# EAGLE board BusPirate-demo-v4 (EAGLE 5.10)
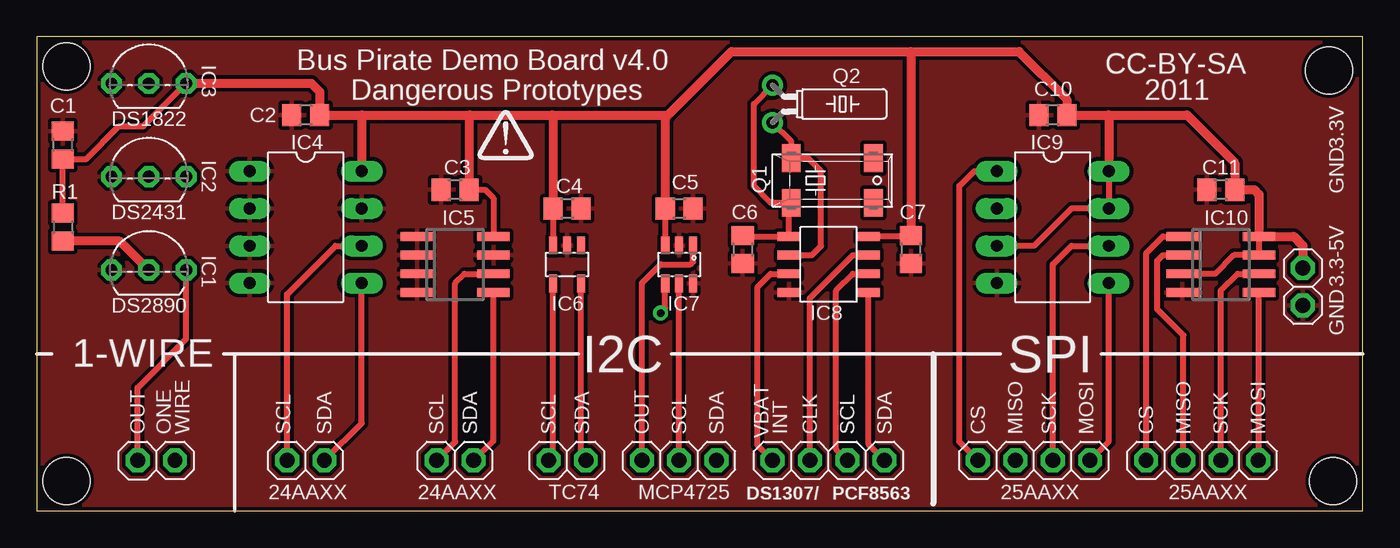
[diagram p0: board, top side]
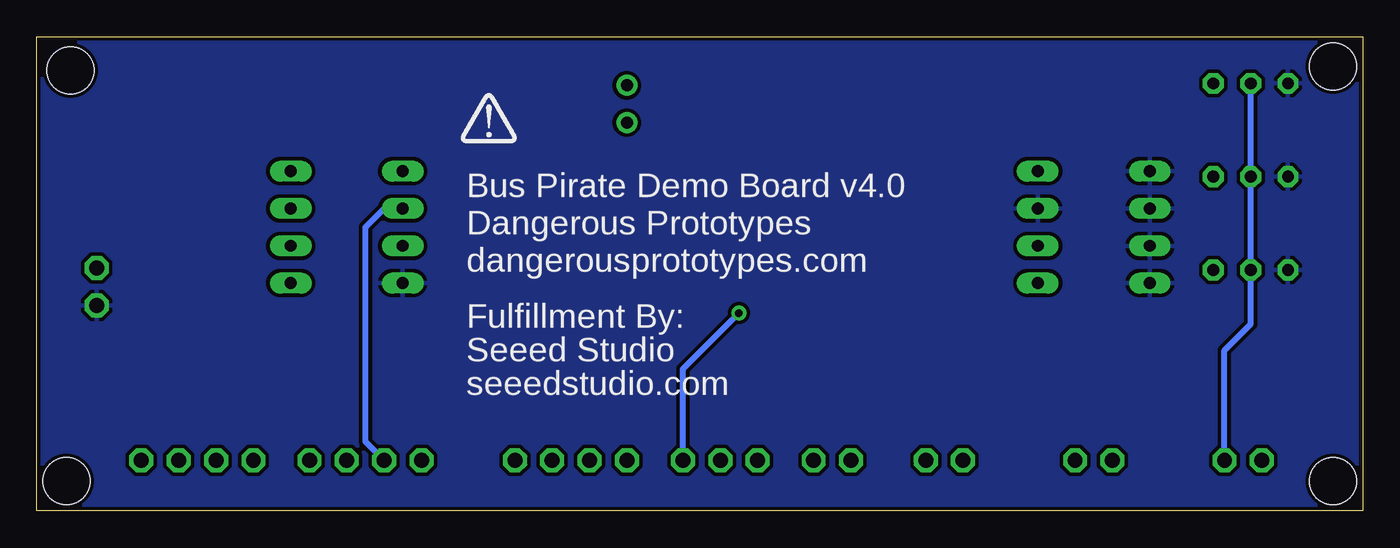
[diagram p1: board, bottom side, seen from below]

Size 90.17 x 32.26 mm. Coordinates in mm from the lower left corner, seen from the top.
Outline: 0,0 90.17,0 90.17,32.26 0,32.26 0,0
Copper layers (1*16): Top 0.035mm / dielectric 1.5mm / Bottom 0.035mm
Design rules "SparkFun - modified *": minimum track width 8mil, minimum drill 15mil, track to track 6mil, track to pad 6mil, pad to pad 6mil, via to via 6mil, smd to smd 6mil, copper to edge 10mil, drill to drill 8mil, minimum pad ring 12mil, minimum via ring 10mil, stop-mask expansion 4mil, vias tented up to drill 25mil, thermal gap 10mil
Holes 3.2 mm at 2.03,2.03 88.14,2.03 87.88,29.97 2.03,30.23

## Footprints (pad centres in the part's own frame; a part is rotated, then mirrored left to right if it is on the bottom)
C805 = smd 1.3 x 1.5: 1 -0.95,0; 2 0.95,0
TO92- = drill 0.813 octagon: 1 -2.54,0; 2 0,0; 3 2.54,0
DIL8 = drill 0.813 long: 1 -3.81,-3.81; 2 -1.27,-3.81; 3 1.27,-3.81; 4 3.81,-3.81; 5 3.81,3.81; 6 1.27,3.81; 7 -1.27,3.81; 8 -3.81,3.81
SO-08 = smd 0.6 x 2.2: 1 -1.905,-2.6; 2 -0.635,-2.6; 3 0.635,-2.6; 4 1.905,-2.6; 5 1.905,2.6; 6 0.635,2.6; 7 -0.635,2.6; 8 -1.905,2.6
SOT-23-5 = smd 0.55 x 1.2: 1 -0.95,-1.3; 2 0,-1.3; 3 0.95,-1.3; 4 0.95,1.3; 5 -0.95,1.3
SOT23-6 = smd 0.55 x 1.2: 1 -0.95,-1.3; 2 0,-1.3; 3 0.95,-1.3; 4 0.95,1.3; 5 0,1.3; 6 -0.95,1.3
SO8 = smd 0.6 x 1.55: 1 -1.905,-2.69; 2 -0.635,-2.69; 3 0.635,-2.69; 4 1.905,-2.69; 5 1.905,2.71; 6 0.635,2.71; 7 -0.635,2.71; 8 -1.905,2.71
1X01 = drill 1.016 octagon: 1 0,0
1X02 = drill 1.016 octagon: 1 -1.27,0; 2 1.27,0
1X03 = drill 1.016 octagon: 1 -2.54,0; 2 0,0; 3 2.54,0
1X04 = drill 1.016 octagon: 1 -3.81,0; 2 -1.27,0; 3 1.27,0; 4 3.81,0
MM20SS = smd 1.27 x 1.88: 1 -2.794,-1.524; 2 2.794,-1.524; 3 2.794,1.524; 4 -2.794,1.524
TC26H = drill 0.813 round: 1 -1.27,0; 2 1.27,0
R805 = smd 1.3 x 1.5: 1 -0.95,0; 2 0.95,0

## Placement (x,y rotation side)
C1  0.1 uF  [C805]  1.78,24.89 90 top
C2  0.1 uF  [C805]  18.29,26.92 180 top
C3  0.1 uF  [C805]  28.45,21.84 180 top
C4  0.1 uF  [C805]  36.07,20.57 0 top
C5  0.1 uF  [C805]  43.69,20.57 0 top
C6  12.5pF  [C805]  48.01,17.78 270 top
C7  0.1 uF  [C805]  59.44,17.78 270 top
C10  0.1 uF  [C805]  69.09,26.92 180 top
C11  0.1 uF  [C805]  80.52,21.84 180 top
IC1  DS2890  [TO92-]  7.62,16.38 0 top
IC2  DS2431  [TO92-]  7.62,22.73 0 top
IC3  DS1822  [TO92-]  7.62,29.08 0 top
IC4  24AA02P  [DIL8]  18.29,19.3 270 top
IC5  24AA02SN  [SO-08]  28.45,16.76 270 top
IC6  TC74  [SOT-23-5]  36.07,16.76 180 top
IC7  MCP4725  [SOT23-6]  43.69,16.76 180 top
IC8  PCF8563/DS1307  [SO8]  53.85,16.76 270 top
IC9  25AA080P  [DIL8]  69.09,19.3 270 top
IC10  25AA080SN  [SO-08]  80.52,16.76 270 top
JP1  [1X01]  9.4,3.43 0 top
JP2  [1X01]  6.86,3.43 90 top
JP3  [1X02]  18.29,3.43 180 top
JP4  [1X02]  28.45,3.43 180 top
JP5  [1X02]  36.07,3.43 180 top
JP6  [1X03]  43.69,3.43 180 top
JP7  [1X04]  53.85,3.43 180 top
JP11  [1X04]  67.82,3.43 180 top
JP12  [1X04]  79.25,3.43 180 top
JP13  [1X02]  86.11,15.24 270 top
Q1  32.768KHz  [MM20SS]  54.1,22.48 0 top
Q2  32.768KHz  [TC26H]  50.04,27.69 270 top
R1  2K0  [R805]  1.78,19.3 270 top
U$1  [DP_LOGO]  31.88,24.51 0 top
U$2  [DP_LOGO]  59.44,25.65 0 bottom

## Library data of the parts
C1-C7 C10 C11 IC6-IC8 R1 U$1 U$2 = dp_devices
IC1-IC3 = 1wire
IC4 IC5 IC9 IC10 = microchip
JP1-JP7 JP11-JP13 = pinhead - Copy
Q1 Q2 = crystal

## Nets
1: IC4.6 JP3.2
1-WIRE: IC1.2 IC2.2 IC3.2 JP1.1 R1.2
2: IC4.5 JP3.1
3: IC5.6 JP4.2
4: IC5.5 JP4.1
5: IC6.5 JP5.1
6: IC6.4 JP5.2
8: IC7.5 JP6.2
10: IC7.1 JP6.3
11: IC8.3 JP7.4
12: IC8.7 JP7.3
13: IC8.6 JP7.2
14: IC8.5 JP7.1
GND: C1.2 C2.2 C3.2 C4.2 C5.2 C6.2 C7.2 C10.2 C11.2 IC1.1 IC2.1 IC3.1 IC4.1 IC4.2 IC4.3 IC4.4 IC4.7 IC5.1 IC5.2 IC5.3 IC5.4 IC5.7 IC6.2 IC7.2 IC7.6 IC8.4 IC9.4 IC10.4 JP13.2
N$1: IC7.4 JP6.1
N$6: C6.1 IC8.1 Q1.1 Q2.1
N$14: IC8.2 Q1.4 Q2.2
N$20: IC9.1 JP11.4
N$21: IC9.2 JP11.3
N$22: IC10.2 JP12.3
N$24: IC9.5 JP11.1
N$30: IC9.6 JP11.2
N$31: IC10.5 JP12.1
N$32: IC10.6 JP12.2
N$52: IC10.1 JP12.4
POT_OUT: IC1.3 JP2.1
VCC: C1.1 C2.1 C3.1 C4.1 C5.1 C7.1 C10.1 C11.1 IC3.3 IC4.8 IC5.8 IC6.3 IC7.3 IC8.8 IC9.3 IC9.7 IC9.8 IC10.3 IC10.7 IC10.8 JP13.1 R1.1

## Tracks (layer width: path | path; a pad name or v marks a point on that pad's centre or on a via)
1
  Top 0.406: JP3.2 17.02,14.73 20.32,18.03 IC4.6
1-WIRE
  Top 0.61: R1.2 5.65,18.35 IC1.2
  Bottom 0.406: IC3.2 IC2.2 IC1.2 7.62,12.7 9.4,10.92 JP1.1
2
  Top 0.406: IC4.5 22.1,5.97 JP3.1
3
  Top 0.406: IC5.6 29.08,16.13 28.45,15.49 28.45,4.7 JP4.2
4
  Top 0.406: IC5.5 31.05,4.76 JP4.1
5
  Top 0.406: IC6.5 37.02,3.75 JP5.1
6
  Top 0.406: IC6.4 35.12,3.75 JP5.2
8
  Top 0.406: JP6.2 IC7.5
10
  Top 0.406: IC7.1 44.64,16.95 44.45,16.76 42.42,16.76 41.15,15.49 JP6.3
11
  Top 0.406: IC8.3 49.91,16.13 49.02,15.24 49.02,4.45 JP7.4
12
  Top 0.406: IC8.7 55.5,17.4 52.58,14.48 JP7.3
13
  Top 0.406: IC8.6 55.5,16.13 54.36,14.99 54.36,4.19 JP7.2
14
  Top 0.406: IC8.5 56.56,4.53 JP7.1
GND
  pour Bottom (isolate 0.254): 0,32.26 0,0 90.17,0 90.17,32.26
  pour Top (isolate 0.254): 0,0 90.17,0 90.17,32.26 0,32.26
N$1  (via drill 0.51)
  Top 0.406: IC7.4 42.74,13.78 v42.42,13.46
  Bottom 0.406: v42.42,13.46 46.23,9.65 JP6.1
N$6
  Top 0.406: Q2.1 48.77,27.69 48.77,22.1 49.91,20.95 Q1.1 51.16,20.85 IC8.1 48.07,18.67 C6.1
N$14
  Top 0.406: IC8.2 52.7,17.4 53.34,18.03 53.34,23.11 52.45,24 Q1.4 51.31,25.15 Q2.2
N$20
  Top 0.406: IC9.1 63.75,23.11 62.74,22.1 62.74,4.7 JP11.4
N$21
  Bottom 0.406: IC9.2 66.55,20.57 67.82,19.3 67.82,4.7 JP11.3
N$22
  Top 0.406: IC10.2 76.58,17.4 76.2,17.02 76.2,13.72 77.98,11.94 JP12.3
N$24
  Top 0.406: IC9.5 72.9,4.7 JP11.1
N$30
  Top 0.406: IC9.6 70.36,18.03 69.09,16.76 JP11.2
N$31
  Top 0.406: IC10.5 83.12,3.49 JP12.1
N$32
  Top 0.406: JP12.2 80.52,14.99 81.66,16.13 IC10.6
N$52
  Top 0.406: IC10.1 76.58,18.67 75.44,17.53 JP12.4
POT_OUT
  Top 0.406: IC1.3 10.16,11.68 6.86,8.38 JP2.1
VCC
  Top 0.406: IC10.3 80.14,16.13 81.41,17.4 IC10.7 IC10.8 | IC9.3 67.82,18.03 70.36,20.57 IC9.7 IC9.8 | IC5.8 31.05,21.28 30.48,21.84 C3.1 | C4.1 IC6.3 | C5.1 IC7.3 | R1.1 C1.1 3.37,23.94 5.59,26.16 7.24,26.16 IC3.3 | IC8.8 59.38,18.67 C7.1
  Top 0.61: 72.9,26.92 IC9.8 | 22.1,26.92 C2.1 19.24,28.51 18.67,29.08 IC3.3 | 22.1,26.92 IC4.8 | 22.1,26.92 29.46,26.92 | 29.46,26.92 35.05,26.92 | C3.1 29.4,26.86 29.46,26.92 | C4.1 35.12,26.86 35.05,26.92 | 72.9,26.92 C10.1 70.04,28.01 66.8,31.24 59.44,31.24 | 72.9,26.92 78.23,26.92 81.47,23.69 C11.1 82.8,21.84 83.12,21.53 IC10.8 85.47,18.67 86.11,18.03 JP13.1 | 35.05,26.92 42.93,26.92 | 42.93,26.92 47.24,31.24 59.44,31.24 | C5.1 42.74,26.74 42.93,26.92 | 59.44,31.24 C7.1

## Text on the board
tPlace: Bus Pirate Demo Board v4.0 | CC-BY-SA | Dangerous Prototypes | 2011 | DS1822 | 3.3V | GND | DS2431 | 3.3-5V | DS2890 | GND | 1-WIRE | I2C | SPI | OUT | ONE | WIRE | SCL | SDA | SCL | SDA | SCL | SDA | OUT | SCL | SDA | VBAT | INT | CLK | SCL | SDA | CS | MISO | SCK | MOSI | CS | MISO | SCK | MOSI | 24AAXX | 24AAXX | TC74 | MCP4725 | DS1307/ | PCF8563 | 25AAXX | 25AAXX
bPlace: Bus Pirate Demo Board v4.0 | Dangerous Prototypes | dangerousprototypes.com | Fulfillment By: | Seeed Studio | seeedstudio.com